# Altium PCB PCB1.PcbDoc
Units mil, origin at the board's own origin, x right, y up, seen from the top; angles counter-clockwise.
Board outline 1181.1 x 1456.69 mil, 4 copper layers (Top Layer, Layer 2, Layer 3, Bottom Layer), stack 23.756 mil thick; 82 components, 42 nets, 316 pads, 160 vias.
Unrouted connection lines stored in the file: 4.
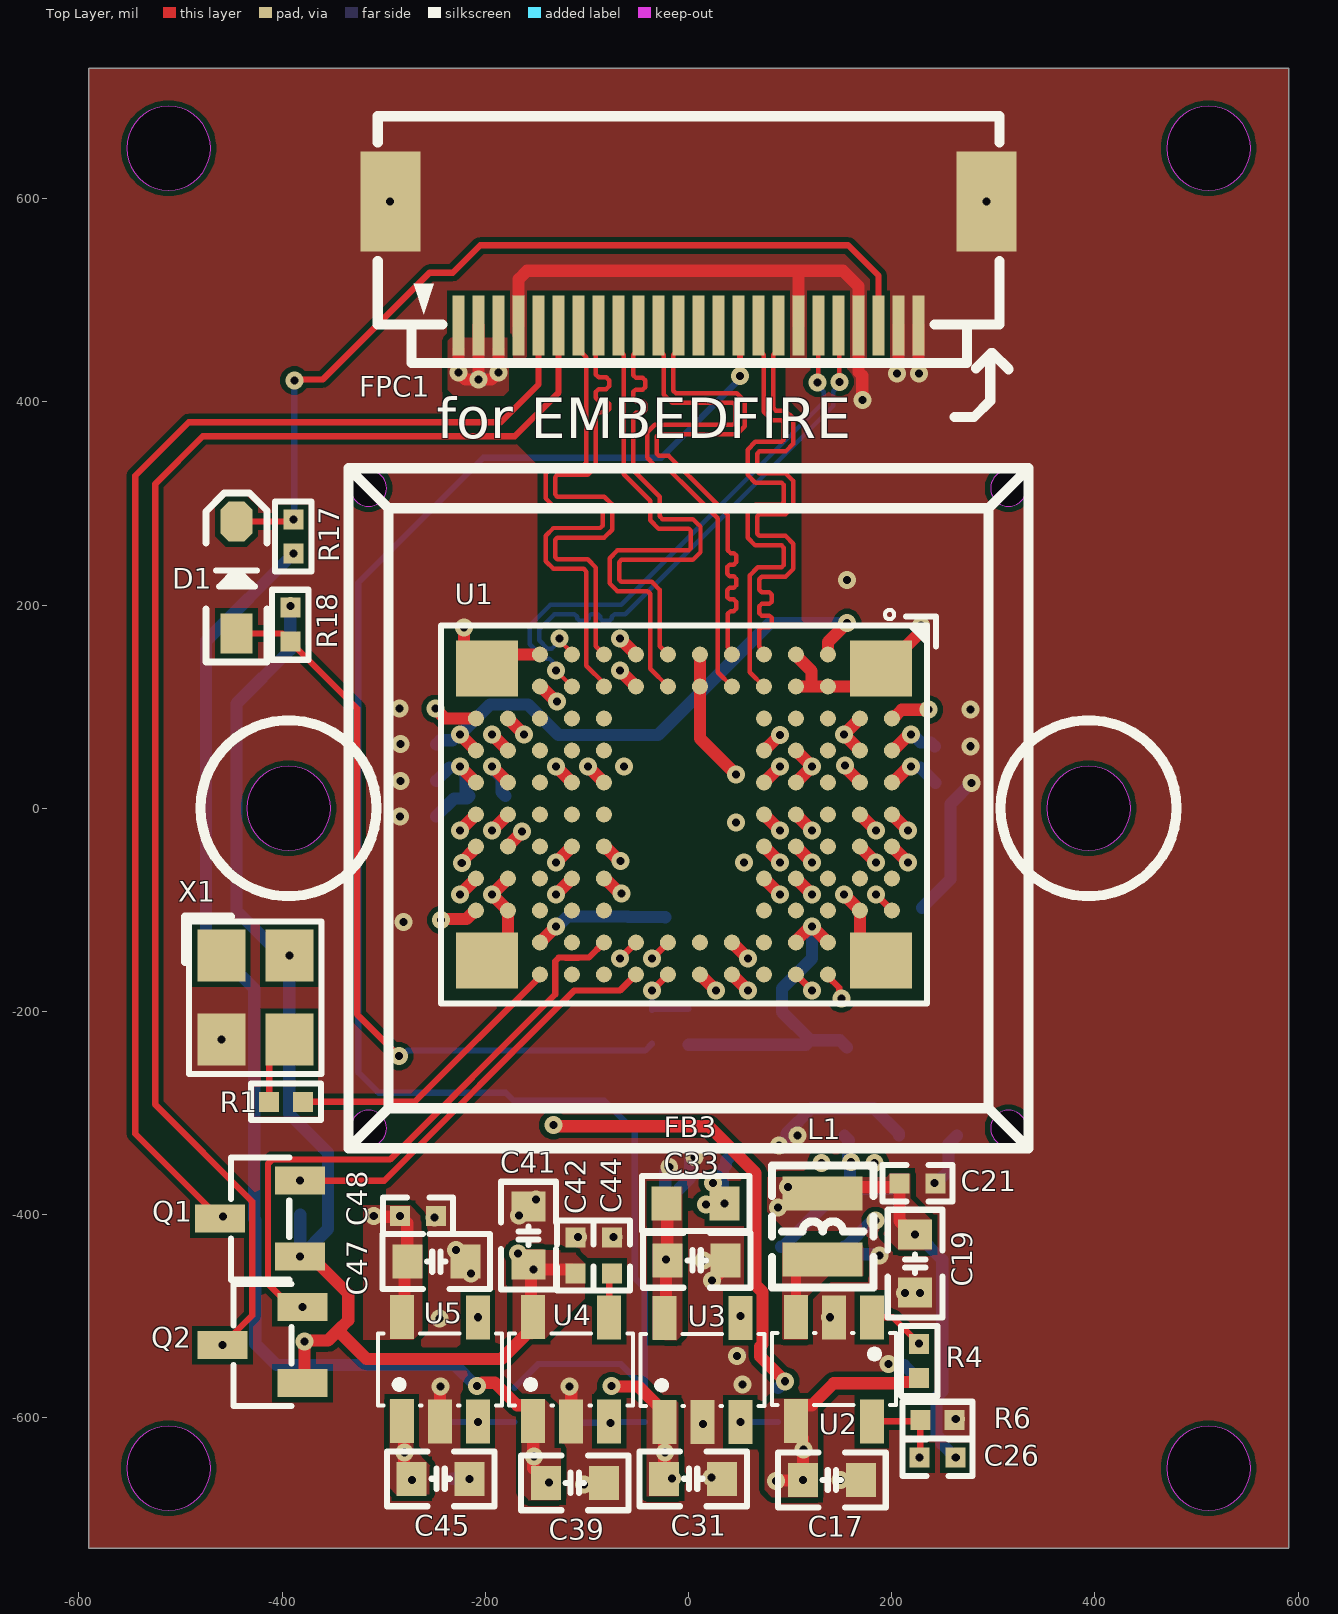
[diagram p0: Top Layer view]
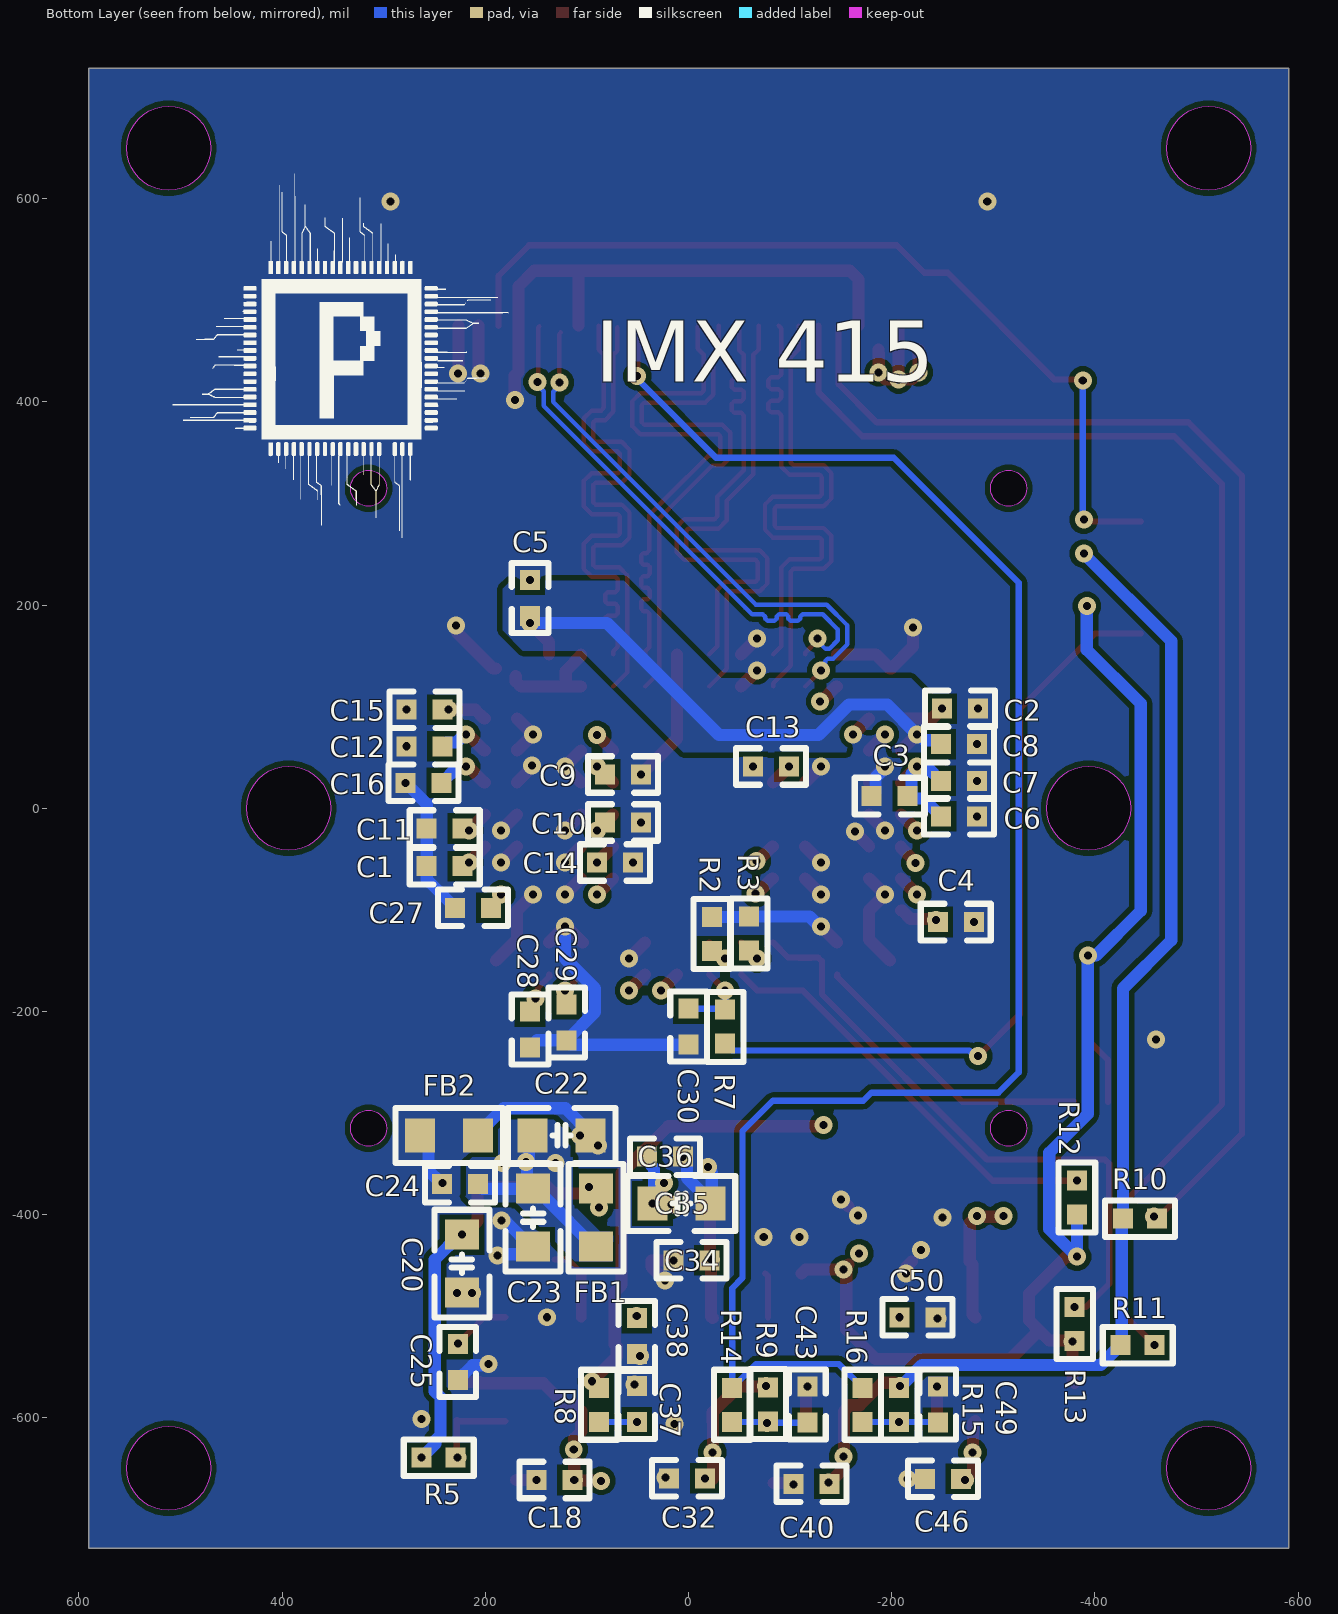
[diagram p1: Bottom Layer view, seen from below]
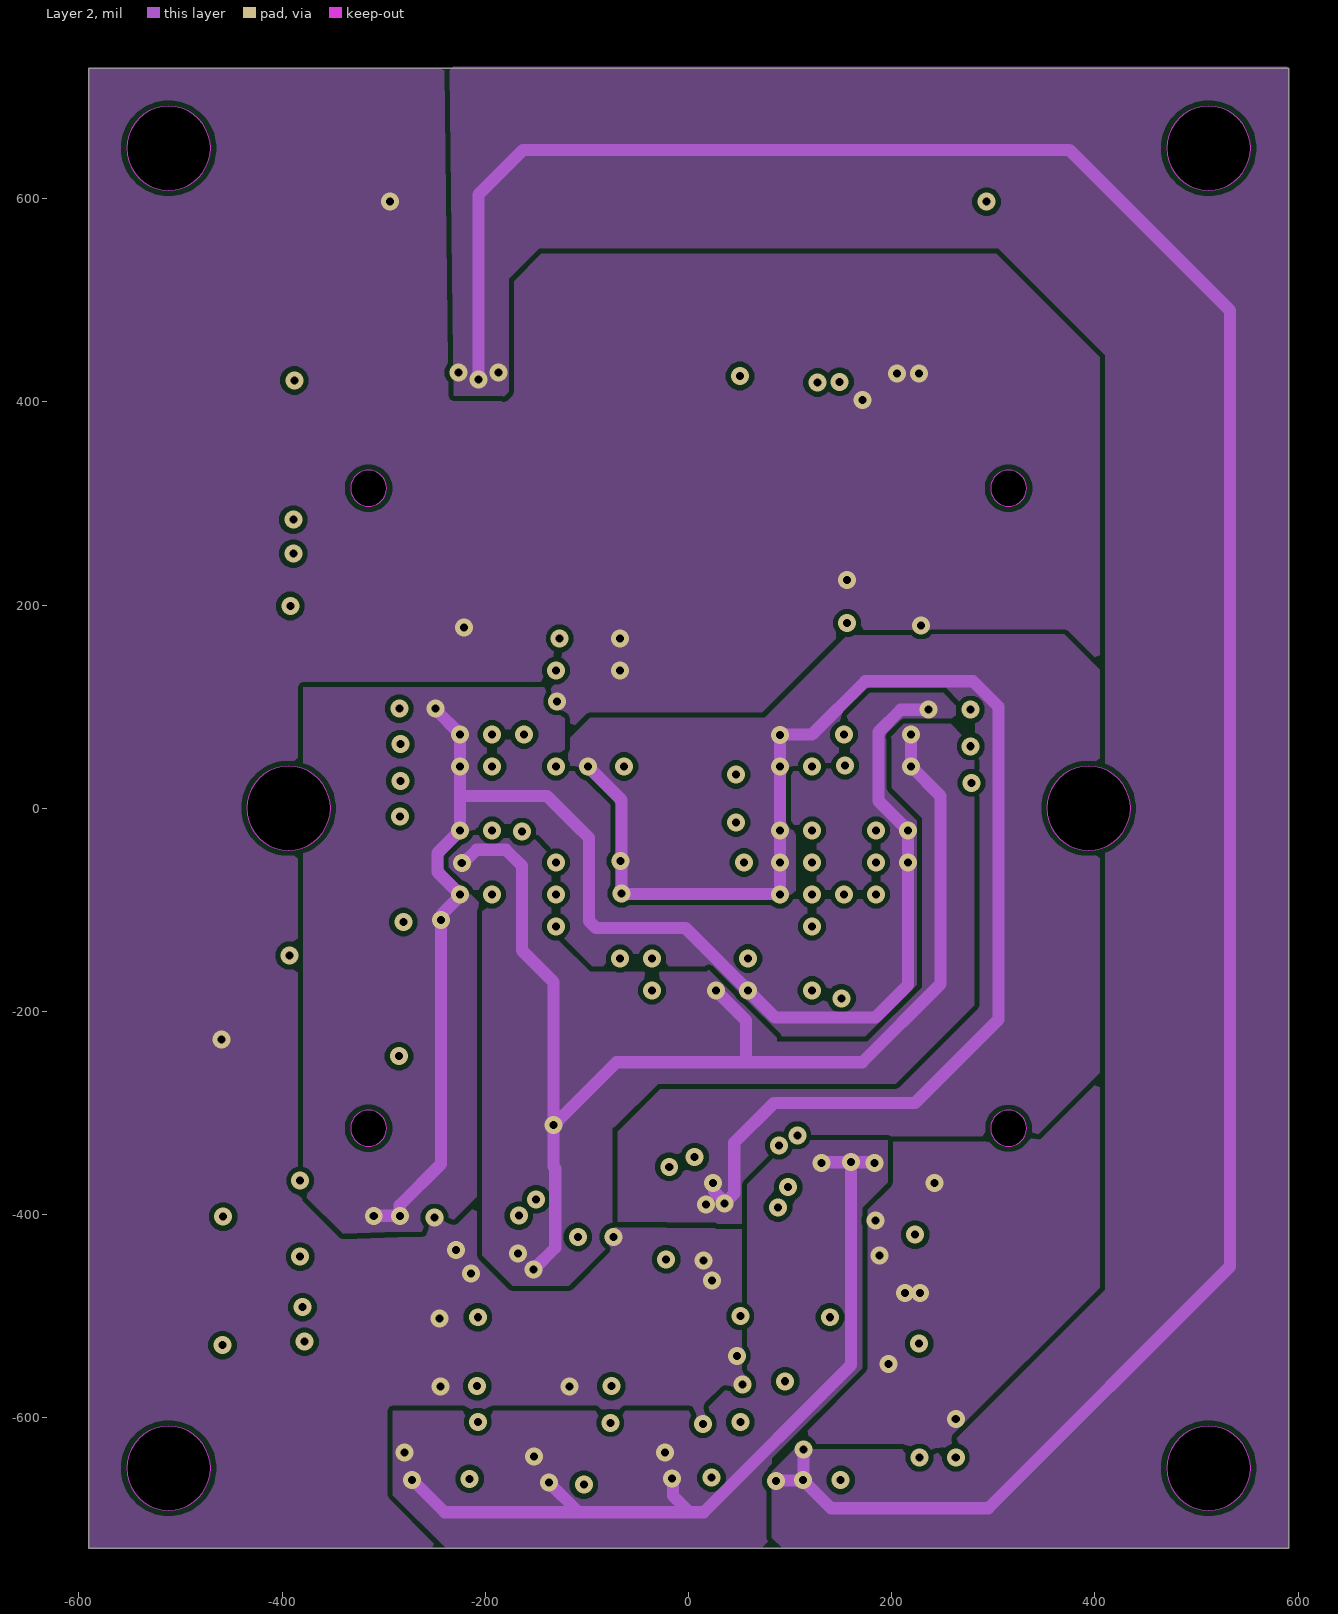
[diagram p2: Layer 2]
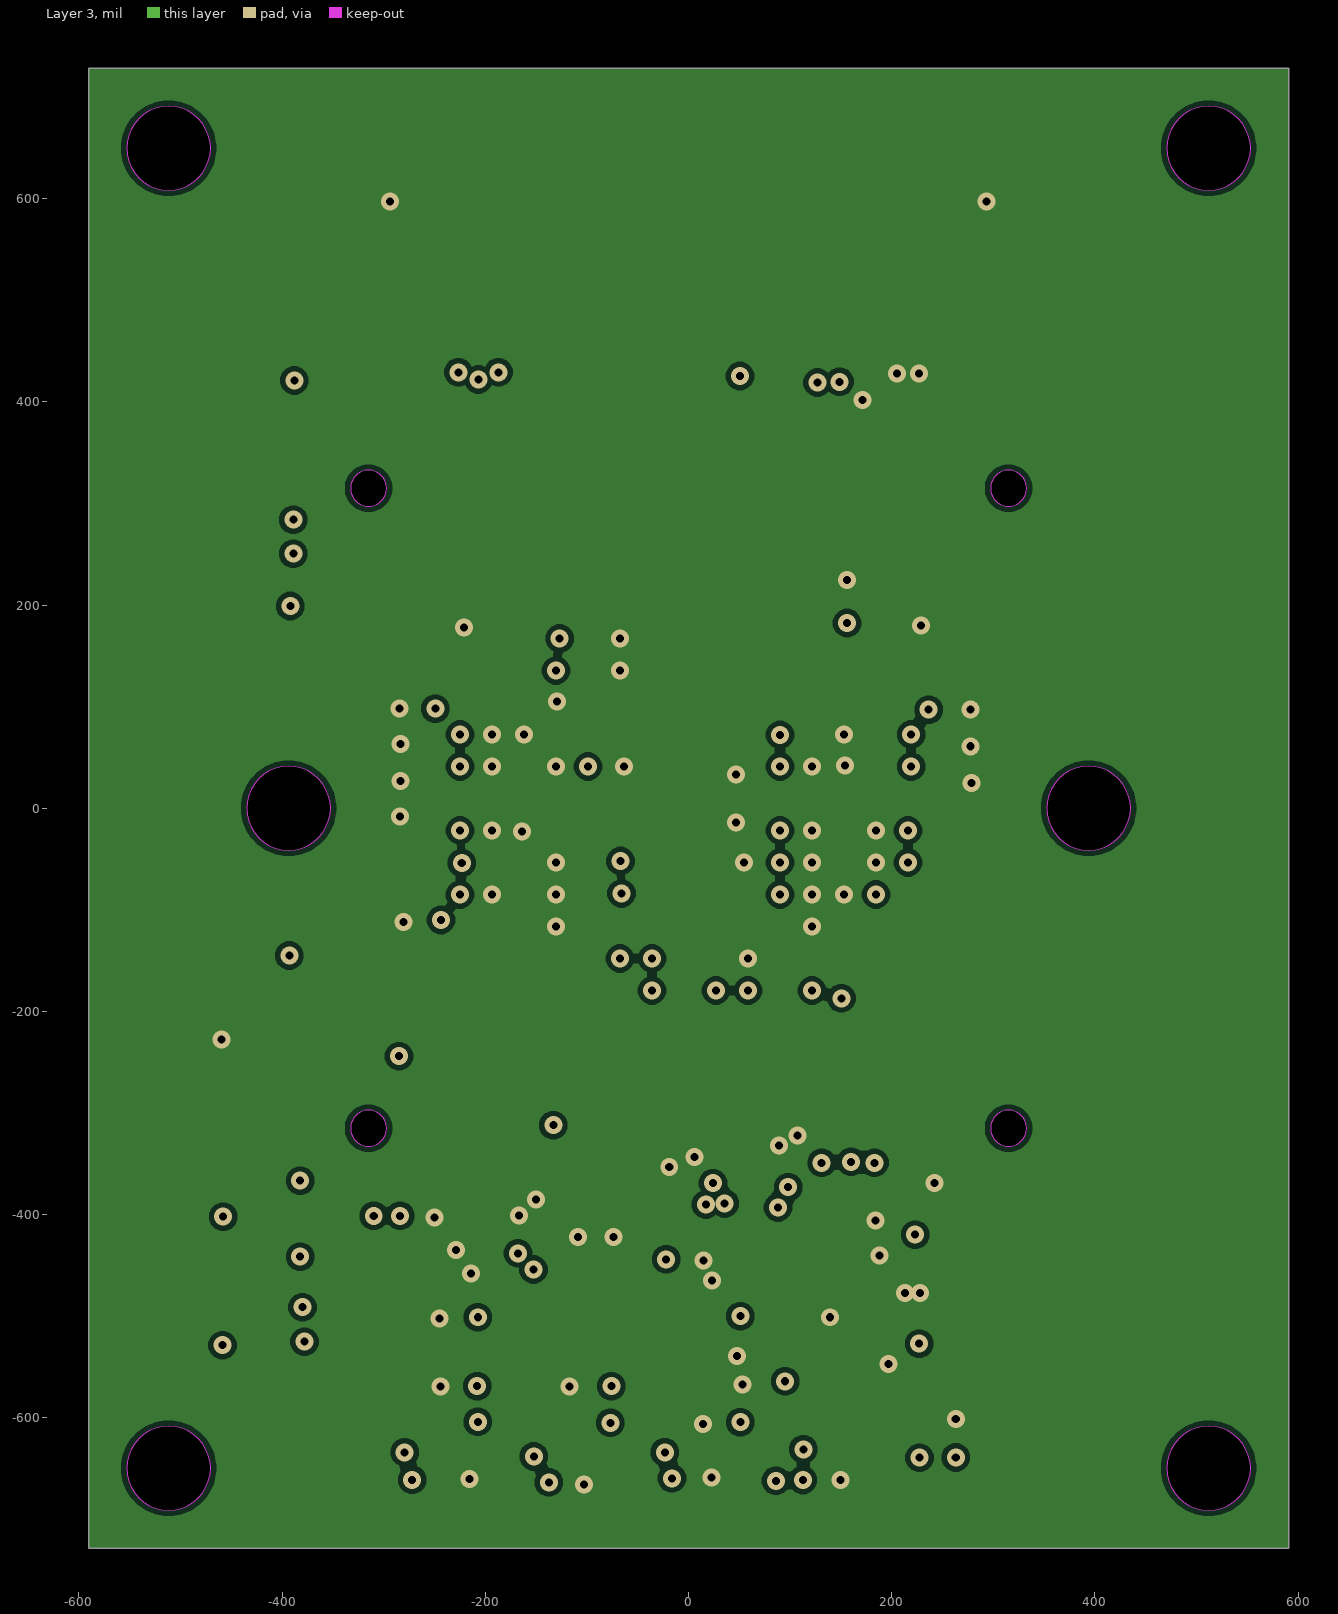
[diagram p3: Layer 3]
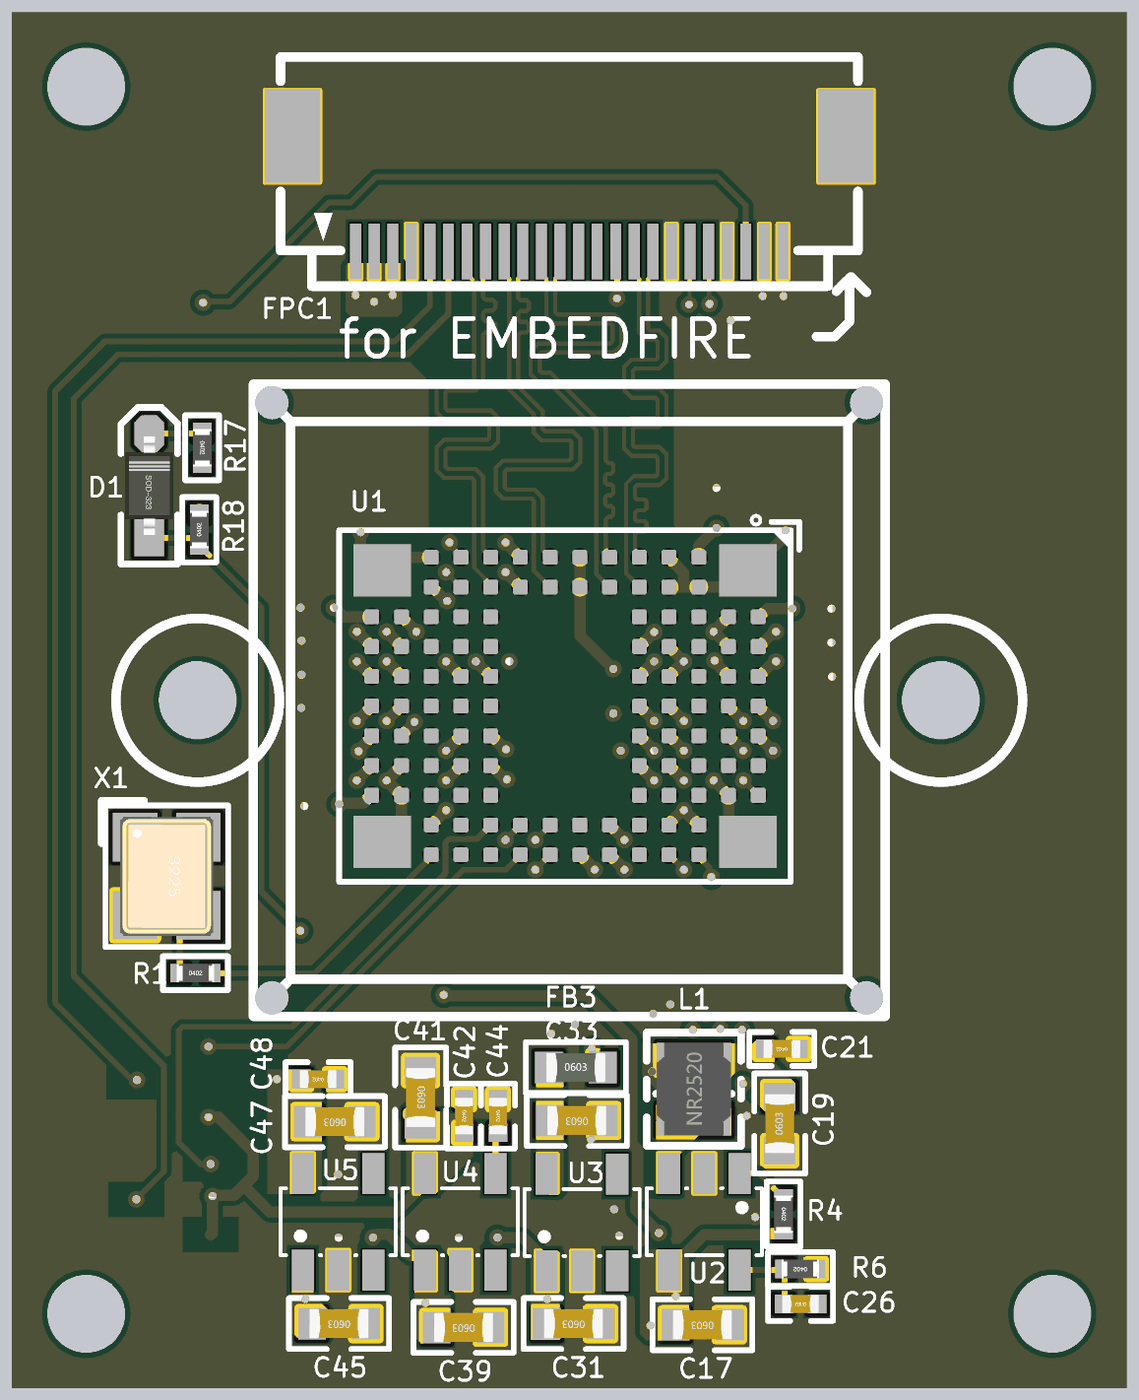
[diagram p4: 3D render of the assembled board from above, using the file's embedded part models]
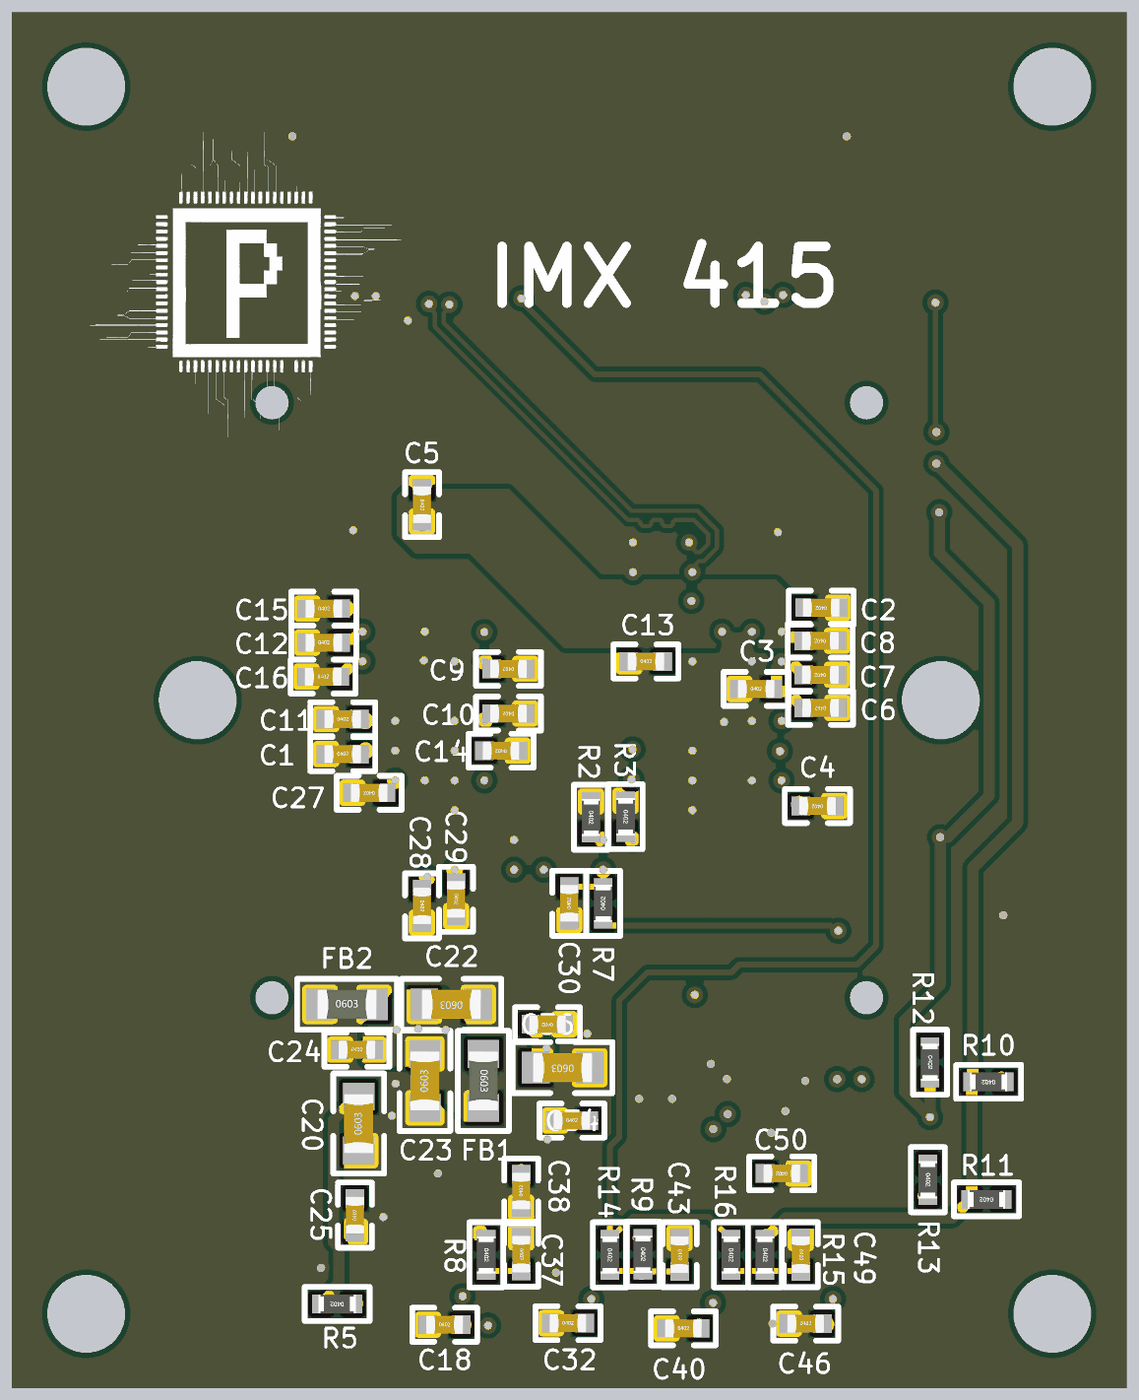
[diagram p5: 3D render of the assembled board from below, using the file's embedded part models]

## Layer stack, top to bottom
Top Solder: solder mask 0.4, Solder Resist, Dk 3.5
Top Layer: signal copper 1.4
Dielectric 4: prepreg 2.8, PP-006, Dk 4.1
Layer 2: signal copper 1.378
Dielectric 1: dielectric 12.6, FR-4, Dk 4.8
Layer 3: signal copper 1.378
Dielectric 5: prepreg 2.8, PP-006, Dk 4.1
Bottom Layer: signal copper 1.4
Bottom Solder: solder mask 0.4, Solder Resist, Dk 3.5

## Board outline
-590.55,-728.35 -590.55,728.35 590.55,728.35 590.55,-728.35
cut-out: 470.47,-649.61 ccw(c511.81,-649.61) 511.81,-690.94 ccw(c511.81,-649.61) 553.15,-649.61 ccw(c511.81,-649.61) 511.81,-608.27 ccw(c511.81,-649.61)
cut-out: -553.15,-649.61 ccw(c-511.81,-649.61) -511.81,-690.94 ccw(c-511.81,-649.61) -470.47,-649.61 ccw(c-511.81,-649.61) -511.81,-608.27 ccw(c-511.81,-649.61)
cut-out: -553.15,649.61 ccw(c-511.81,649.61) -511.81,608.27 ccw(c-511.81,649.61) -470.47,649.61 ccw(c-511.81,649.61) -511.81,690.94 ccw(c-511.81,649.61)
cut-out: 470.47,649.61 ccw(c511.81,649.61) 511.81,608.27 ccw(c511.81,649.61) 553.15,649.61 ccw(c511.81,649.61) 511.81,690.94 ccw(c511.81,649.61)
cut-out: 297.24,-314.96 ccw(c314.96,-314.96) 314.96,-332.68 ccw(c314.96,-314.96) 332.68,-314.96 ccw(c314.96,-314.96) 314.96,-297.24 ccw(c314.96,-314.96)
cut-out: -332.68,-314.96 ccw(c-314.96,-314.96) -314.96,-332.68 ccw(c-314.96,-314.96) -297.24,-314.96 ccw(c-314.96,-314.96) -314.96,-297.24 ccw(c-314.96,-314.96)
cut-out: 297.24,314.96 ccw(c314.96,314.96) 314.96,297.24 ccw(c314.96,314.96) 332.68,314.96 ccw(c314.96,314.96) 314.96,332.68 ccw(c314.96,314.96)
cut-out: -332.68,314.96 ccw(c-314.96,314.96) -314.96,297.24 ccw(c-314.96,314.96) -297.24,314.96 ccw(c-314.96,314.96) -314.96,332.68 ccw(c-314.96,314.96)
cut-out: 352.36,0 ccw(c393.7,0) 393.7,-41.34 ccw(c393.7,0) 435.04,0 ccw(c393.7,0) 393.7,41.34 ccw(c393.7,0)
cut-out: -435.04,0 ccw(c-393.7,0) -393.7,-41.34 ccw(c-393.7,0) -352.36,0 ccw(c-393.7,0) -393.7,41.34 ccw(c-393.7,0)

## Design rules (kind name [scope] priority, off if disabled: settings)
Clearance via_poly [IsVia vs InPoly] p1: gap=5 ignorepadtopadclearanceinfootprint=FALSE
Clearance poly [InPoly] p2: gap=5 ignorepadtopadclearanceinfootprint=FALSE
Clearance Clearance_all [All] p3: gap=4 ignorepadtopadclearanceinfootprint=FALSE
DiffPairsRouting 95ohm [InDifferentialPairClass('MIPI')] p1: maxlimit=8 minlimit=5 mostfreqgap=5 toplayer_minwidth=4.42 toplayer_maxwidth=4.42 toplayer_prefwidth=4.42 midlayer1_minwidth=4.42 midlayer1_maxwidth=4.42 midlayer1_prefwidth=4.42 midlayer2_minwidth=4.42 midlayer2_maxwidth=4.42 midlayer2_prefwidth=4.42 bottomlayer_minwidth=4.42 bottomlayer_maxwidth=4.42 bottomlayer_prefwidth=4.42 maxuncoupledlength=500
PlaneClearance [All] p1: clearance=7
PlaneConnect [All] p1: planeconnectstyle=Direct reliefexpansion=20 reliefentries=4 reliefconductorwidth=10 reliefairgap=10
PolygonConnect [All] p1: connectstyle=Direct reliefconductorwidth=10 reliefentries=4 polygonreliefangle="90 Angle" airgapwidth=10
RoutingVias [All] p1: holewidth=7.9 width=17.7 viastyle="Through Hole" minholewidth=7.9 minwidth=17.7 maxholewidth=7.9 maxwidth=17.7
SolderMaskExpansion [All] p1: expansion=4 istentingtop=FALSE
Width power [InNetClass('power')] p1: maxlimit=20 minlimit=10 preferedwidth=12 minimp=50.000000 maximp=50.000000 favimp=50.000000
Width [All] p2: maxlimit=14 minlimit=5 preferedwidth=6.16
27 further rules are at their usual default settings.

## Classes and differential pairs
differential pair class MIPI: 1.MIPI_CSI_CLK 2.MIPI_CSI_D0 3.MIPI_CSI_D1 4.MIPI_CSI_D2 5.MIPI_CSI_D3
net class MIPI: MIPI_CSI_CLKN MIPI_CSI_CLKP MIPI_CSI_D0N MIPI_CSI_D0P MIPI_CSI_D1N MIPI_CSI_D1P MIPI_CSI_D2N MIPI_CSI_D2P MIPI_CSI_D3N MIPI_CSI_D3P
net class power: 2V8 AVDD_2V8 AVDD_3V3 DOVDD_1V8 DVDD_1V2 GND VDD_3V3 VDD_5V
differential pair 5.MIPI_CSI_D3: +MIPI_CSI_D3P -MIPI_CSI_D3N
differential pair 4.MIPI_CSI_D2: +MIPI_CSI_D2P -MIPI_CSI_D2N
differential pair 3.MIPI_CSI_D1: +MIPI_CSI_D1P -MIPI_CSI_D1N
differential pair 2.MIPI_CSI_D0: +MIPI_CSI_D0P -MIPI_CSI_D0N
differential pair 1.MIPI_CSI_CLK: +MIPI_CSI_CLKP -MIPI_CSI_CLKN

## Components (designator, comment, footprint, x,y, rotation, side; value= is the part's Value field where it differs from the comment)
C1 "0.1uf" C0402_L 240,-57 r180 bottom
C2 "1uf" C0402_L -267,98 r0 bottom
C3 "1uf" C0402_L -198,12 r180 bottom
C4 "4.7uf" C0402_L -263,-112 r0 bottom
C5 "10nf" C0402_L 156,207 r270 bottom
C6 "1uf" C0402_L -266.28,-8 r0 bottom
C7 "0.1uf" C0402_L -266,27 r0 bottom
C8 "0.1uf" C0402_L -266,63 r0 bottom
C9 "1uf" C0402_L 64.4,33.2 r0 bottom
C10 "0.1uf" C0402_L 64.4,-14.04 r0 bottom
C11 "0.1uf" C0402_L 240,-20 r180 bottom
C12 "0.1uf" C0402_L 260,61 r180 bottom
C13 "10nf" C0402_L -81.28,41.07 r180 bottom
C14 "4.7uf" C0402_L 72.28,-53.41 r0 bottom
C15 "4.7uf" C0402_L 260,97 r180 bottom
C16 "4.7uf" C0402_L 260.72,25 r180 bottom
C17 "22uf" C0603_L 141.05,-661.18 r180 top
C18 "0.1uf" C0402_L 132.05,-661.18 r180 bottom
C19 "22uf" C0603_L 223.05,-448.18 r90 top
C20 "22uf" C0603_L 223.05,-448.18 r90 bottom
C21 "0.1uf" C0402_L 225.33,-369.18 r180 top
C22 "22uf" C0603_L 125,-322 r0 bottom
C23 "22uf" C0603_L 153,-403 r90 bottom
C24 "0.1uf" C0402_L 225,-370 r180 bottom
C25 "0.1uf" C0402_L 227.05,-545.17 r90 bottom
C26 "22pf" C0402_L 245.05,-639.18 r180 top
C27 "0.1uf" C0402_L 212,-98 r0 bottom
C28 "10uf" C0402_L 156,-217.72 r270 bottom
C29 "4.7uf" C0402_L 120,-210.72 r270 bottom
C30 "NC" C0402_L 0,-215 r90 bottom
C31 "22uf" C0603_L 4.54,-660 r180 top
C32 "0.1uf" C0402_L 1.35,-659.49 r180 bottom
C33 "22uf" C0603_L 8,-445 r180 top
C34 "0.1uf" C0402_L -2.83,-445 r180 bottom
C35 "22uf" C0603_L 7,-389 r0 bottom
C36 "0.1uf" C0402_L 23,-343 r0 bottom
C37 "0.1uf" C0402_L 50.91,-586.47 r270 bottom
C38 "NC" C0402_L 50.91,-519.54 r90 bottom
C39 "22uf" C0603_L -112,-664 r180 top
C40 "0.1uf" C0402_L -121,-665 r180 bottom
C41 "22uf" C0603_L -157.49,-420.64 r270 top
C42 "0.1uf" C0402_L -111.49,-440.18 r270 top
C43 "1uf" C0402_L -117,-587 r270 bottom
C44 "NC" C0402_L -75.49,-440.18 r270 top
C45 "22uf" C0603_L -244,-660 r180 top
C46 "0.1uf" C0402_L -250.5,-660 r180 bottom
C47 "22uf" C0603_L -248.31,-446.18 r180 top
C48 "0.1uf" C0402_L -266.14,-401.18 r180 top
C49 "0.1uf" C0402_L -245.36,-587 r270 bottom
C50 "NC" C0402_L -225.16,-501 r0 bottom
D1 "RB521S30" SOD-323 -445,227.12 r90 top
FB1 "100R@100MHz" FB0603 91,-403 r270 bottom
FB2 "100R@100MHz" FB0603 235.54,-322 r180 bottom
FB3 "100R@100MHz" FB0603 7,-389 r0 top
FPC1 "ZX-0.5FPC-2H-HFJ24P" FPC-SMD_24P-P0.50_ZX-0.5FPC-2H-HFJ24P 0,559.71 r180 top
L1 "2.2uH" NR2520 132.05,-411.7 r90 top
Q1 "2SK3018" SOT-23-3_L2.9-W1.3-P1.90-LS2.4-BR -17374.25,16193 r0 top
Q2 "2SK3018" SOT-23-3_L2.9-W1.3-P1.90-LS2.4-BR -17371.99,16068.6 r0 top
R1 "0R" R0402_L -396,-289 r0 top
R2 "10K" R0402_L -23,-124 r270 bottom
R3 "10K" R0402_L -59.62,-123.3 r270 bottom
R4 "10K" R0402_L 227.05,-544.18 r270 top
R5 "200K" R0402_L 246.03,-639.18 r0 bottom
R6 "44.2K" R0402_L 244.78,-602.18 r180 top
R7 "100R" R0402_L -36,-215 r90 bottom
R8 "1K" R0402_L 88,-587.27 r270 bottom
R9 "1K" R0402_L -78.09,-586.63 r270 bottom
R10 "4.7K" R0402_L -444.27,-404 r0 bottom
R11 "4.7K" R0402_L -442,-528.4 r0 bottom
R12 "4.7K" R0402_L -382.26,-383.33 r270 bottom
R13 "4.7K" R0402_L -380,-507.73 r270 bottom
R14 "NC" R0402_L -43,-587.27 r270 bottom
R15 "1K" R0402_L -207.36,-587.27 r270 bottom
R16 "NC" R0402_L -171.36,-587.27 r270 bottom
R17 "10K" R0402_L -389,267.27 r270 top
R18 "10K" R0402_L -392,180.73 r90 top
U1 "IMX415-AAQR-C" BGA-110_L12.0-W9.3-BL_IMX415-AAQR-C 0,0 r180 top locked
U2 "MT3520B" SOT-23-5_L3.0-W1.7-P0.95-LS2.8-BR 143.05,-552.18 r90 top
U3 "XC6221A282MR-G" SOT-23-5_L3.0-W1.7-P0.95-LS2.8-BR 13.5,-553 r270 top
U4 "XC6221A182MR-G" SOT-23-5_L3.0-W1.7-P0.95-LS2.8-BR -115.49,-552.18 r270 top
U5 "XC6221A182MR-G" SOT-23-5_L3.0-W1.7-P0.95-LS2.8-BR -244.85,-552.18 r270 top
X1 "80M" OSC-3225-4P -426.46,-186.34 r270 top

## Footprints (in the part's own frame and the unit in brackets; to place one, negate y for a bottom-side part, rotate by r counter-clockwise, add the part's x,y. Pads: shape width x height; smd on the part's side, far side on the other; paste and mask are expansions set on the pad)
BGA-110_L12.0-W9.3-BL_IMX415-AAQR-C [mm]
  rect 1.55x1.4 smd paste-100 mask-0.05: 1(-4.811,-3.493) 2(-4.811,3.807) 3(5.039,3.807) 4(5.039,-3.493)
  round 0.4 smd paste-100 mask+0.051: A3(-5.086,-2.243) A4(-5.086,-1.443) A5(-5.086,-0.643) A6(-5.086,0.157) A7(-5.086,0.957) A8(-5.086,1.757) A9(-5.086,2.557) B3(-4.286,-2.243) B4(-4.286,-1.443) B5(-4.286,-0.643) B6(-4.286,0.157) B7(-4.286,0.957) B8(-4.286,1.757) B9(-4.286,2.557) C1(-3.486,-3.843) C2(-3.486,-3.043) C3(-3.486,-2.243) C4(-3.486,-1.443) C5(-3.486,-0.643) C6(-3.486,0.157) C7(-3.486,0.957) C8(-3.486,1.757) C9(-3.486,2.557) C10(-3.486,3.357) C11(-3.486,4.157) D1(-2.686,-3.843) D2(-2.686,-3.043) D3(-2.686,-2.243) D4(-2.686,-1.443) D5(-2.686,-0.643) D6(-2.686,0.157) D7(-2.686,0.957) D8(-2.686,1.757) D9(-2.686,2.557) D10(-2.686,3.357) D11(-2.686,4.157) E1(-1.886,-3.843) E2(-1.886,-3.043) E3(-1.886,-2.243) E4(-1.886,-1.443) E5(-1.886,-0.643) E6(-1.886,0.157) E7(-1.886,0.957) E8(-1.886,1.757) E9(-1.886,2.557) E10(-1.886,3.357) E11(-1.886,4.157) F1(-1.086,-3.843) F2(-1.086,-3.043) F10(-1.086,3.357) F11(-1.086,4.157) G1(-0.286,-3.843) G2(-0.286,-3.043) G10(-0.286,3.357) G11(-0.286,4.157) H1(0.514,-3.843) H2(0.514,-3.043) H10(0.514,3.357) H11(0.514,4.157) J1(1.314,-3.843) J2(1.314,-3.043) J10(1.314,3.357) J11(1.314,4.157) K1(2.114,-3.843) K2(2.114,-3.043) K3(2.114,-2.243) K4(2.114,-1.443) K5(2.114,-0.643) K6(2.114,0.157) K7(2.114,0.957) K8(2.114,1.757) K9(2.114,2.557) K10(2.114,3.357) K11(2.114,4.157) L1(2.914,-3.843) L2(2.914,-3.043) L3(2.914,-2.243) L4(2.914,-1.443) L5(2.914,-0.643) L6(2.914,0.157) L7(2.914,0.957) L8(2.914,1.757) L9(2.914,2.557) L10(2.914,3.357) L11(2.914,4.157) M1(3.714,-3.843) M2(3.714,-3.043) M3(3.714,-2.243) M4(3.714,-1.443) M5(3.714,-0.643) M6(3.714,0.157) M7(3.714,0.957) M8(3.714,1.757) M9(3.714,2.557) M10(3.714,3.357) M11(3.714,4.157) N3(4.514,-2.243) N4(4.514,-1.443) N5(4.514,-0.643) N6(4.514,0.157) N7(4.514,0.957) N8(4.514,1.757) N9(4.514,2.557) P3(5.314,-2.243) P4(5.314,-1.443) P5(5.314,-0.643) P6(5.314,0.157) P7(5.314,0.957) P8(5.314,1.757) P9(5.314,2.557)
  silkscreen extent -6.19,-4.96 6.19,4.88
C0402_L [mm]
  rect 0.5x0.5 smd: 1(-0.45,0) 2(0.45,0)
  silkscreen extent -0.87,-0.46 0.88,0.46, body extent -0.5,-0.25 0.5,0.25, height 0.5
C0603_L [mm]
  rect 0.75x0.85 smd: 1(-0.725,0) 2(0.725,0)
  silkscreen extent -1.35,-0.69 1.35,0.69, body extent -0.8,-0.4 0.8,0.4, height 0.8
FB0603 [mm]
  rect 0.75x0.85 smd: 1(-0.725,0) 2(0.725,0)
  silkscreen extent -1.35,-0.69 1.35,0.69, body extent -0.8,-0.4 0.8,0.4, height 0.8
FPC-SMD_24P-P0.50_ZX-0.5FPC-2H-HFJ24P [mm]
  rect 0.3x1.5 smd paste+0 mask+0.051: 1(5.75,2.152) 2(5.25,2.152) 3(4.75,2.152) 4(4.25,2.152) 5(3.75,2.152) 6(3.25,2.152) 7(2.75,2.152) 8(2.25,2.152) 9(1.75,2.152) 10(1.25,2.152) 11(0.75,2.152) 12(0.25,2.152) 13(-0.25,2.152) 14(-0.75,2.152) 15(-1.25,2.152) 16(-1.75,2.152) 17(-2.25,2.152) 18(-2.75,2.152) 19(-3.25,2.152) 20(-3.75,2.152) 21(-4.25,2.152) 22(-4.75,2.152) 23(-5.25,2.152) 24(-5.75,2.152)
  rect 1.5x2.5 smd paste+0 mask+0.051: 25(-7.45,-0.948) 26(7.45,-0.948)
  silkscreen extent -7.77,-3.08 7.77,3.08
NR2520 [mm]
  rect 0.85x2 smd: 1(-0.825,0) 2(0.825,0)
  silkscreen extent -1.52,-1.27 1.52,1.27, body extent -1.25,-1 1.25,1, height 1.12
OSC-3225-4P [mm]
  rect 1.3x1.2 smd: 1(-1.05,-0.85) 2(1.05,-0.85) 3(1.05,0.85) 4(-1.05,0.85)
  silkscreen extent -2.03,-1.75 1.91,1.65, body extent -1.6,-1.25 1.6,1.25, height 0.7
R0402_L [mm]
  rect 0.5x0.5 smd: 1(-0.425,0) 2(0.425,0)
  silkscreen extent -0.88,-0.46 0.87,0.46, body extent -0.5,-0.25 0.5,0.25, height 0.3
SOD-323 [mm]
  rect 1x0.8 smd: 1(-1.4,0)
  oct 1x0.8 smd: 2(1.4,0)
  silkscreen extent -2.11,-0.76 2.11,0.76, body extent -1.32,-0.65 1.32,0.65, height 0.95
SOT-23-3_L2.9-W1.3-P1.90-LS2.4-BR [mm]
  rect 1.25x0.7 smd paste+0 mask+0.051: 1(431.596,-422.514) 2(431.596,-420.614) 3(429.597,-421.564)
  silkscreen extent 429.87,-423.09 431.32,-420.04
SOT-23-5_L3.0-W1.7-P0.95-LS2.8-BR [mm]
  rect 1.1x0.6 smd paste+0 mask+0.051: 1(1.3,-0.95) 2(1.3,0) 3(1.3,0.95) 4(-1.3,0.95) 5(-1.3,-0.95)
  silkscreen extent -0.9,-1.55 0.9,1.55

## Part data
C1 C2 C3 C4 C5 C6 C7 C8 C9 C10 C11 C12 C13 C14 C15 C16 C17 C18 C19 C20 C21 C22 C23 C24 C25 C26 C27 C28 C29 C30 C31 C32 C33 C34 C35 C36 C37 C38 C39 C40 C41 C42 C43 C44 C45 C46 C47 C48 C49 C50: library part C, "贴片电容/MLCC电容"
D1: library part TVS
FB1 FB2 FB3: library part FB, "贴片磁珠"
L1: library part L-NR, "太诱-NR磁胶电感"
R1 R2 R3 R4 R5 R6 R7 R8 R9 R10 R11 R12 R13 R14 R15 R16 R17 R18: library part R, "贴片电阻"
U4 U5: library part XC6221A282MR-G
X1: library part XTAL-ACT-4P, "4脚有源晶振(振荡器)"

## Via types
v1: diameter 17.7, hole 7.9, Top Layer to Bottom Layer, tented both sides, 160 vias

## Nets (pads, with @x,y where several pads share a name; then routed paths per layer and width w, separated by ;. In a path a pad name is that pad's centre, name@x,y a point inside that pad or via, vN(x,y) a via of type N, cw(c..) or ccw(c..) an arc to the next point about the centre after c; other vN are vias at no path point)
2V8: C33.2 C34.2 FB3.1 U3.5 | length 116.1
  Top Layer w12: U3.5 -22.22,-500.14 -22.22,-444.22 v1(-22,-444) -21.04,-443.04 -21.04,-389.5 FB3.1
  Bottom Layer w12: v1(-22,-444) -21,-445 C34.2
AVDD_2V8: C9.2 C10.2 C13.2 C14.2 C35.2 C36.2 FB3.2 U1.E4 U1.E5 U1.E6 U1.E7 U1.E8 U1.K5 U1.K7 U1.K8 | length 1631.4
  Top Layer w12: v1(-98.99,41.07) U1.K5 ; U1.K8 -82.23,-69.16 -67.52,-83.87 v1(-66,-83.87) ; U1.K7 -82.29,-37.67 -67.96,-52 v1(-67,-52) ; U1.E8 v1(89.99,-84.91) ; U1.E7 v1(89.99,-53.41) ; U1.E6 v1(89.99,-21.92) ; U1.E5 v1(89.99,41.07) ; U1.E4 74.45,56.82 89.78,72.15 v1(89.99,72.15)
  Layer 2 w12: v1(-98.99,41.07) -66,8.08 v1(-66,-83.87) -65.48,-84.39 89.47,-84.39 v1(89.99,-84.91) v1(89.99,-53.41) v1(89.99,-21.92) v1(89.99,41.07) 89.99,72.57 121.48,72.57 173.91,125 280,125 305,100 305,-208 223,-290 84,-290 45,-329 45,-379.12 v1@35.54,-388.58 ; v1@25.09,-369.91 25.09,-377 35.54,-387.46 v1@35.54,-388.58 ; v1(35.54,-389) v1@35.54,-388.58
  Bottom Layer w12: C35.2@34,-388 34,-354.27 36.87,-351.39 36.87,-346.84 C36.2
  other v1: 17,-390 24,-369
AVDD_3V3: C19.2 C20.2 C21.2 C26.1 FB1.1 L1.2 R5.2 | length 416.6
  Top Layer w12: v1(98,-373) 104.22,-379.22 L1.2 138.25,-373.02 203.77,-373.02 C21.2 207.62,-406.17 221.08,-419.64 v1(223.05,-419.64) ; C26.1 C26.1 v1(263,-639)
  Bottom Layer w12: v1(223.05,-419.64) 225.02,-419.64 249.78,-444.4 249.78,-573.98 244,-579.76 244,-617 249.14,-622.14 249.14,-625.56 R5.2
  other v1: 88,-393
DOVDD_1V8: C12.2 C16.2 C41.2 C42.2 Q1.1 Q2.1 R8.1 R12.2 R13.2 R18.2 U1.A4 U1.A5 U1.G11 U1.P7 U4.5 X1.4 | length 3138.6
  Top Layer w12: R18.2 v1(-392,199) ; v1(-382.26,-441.4) -371.44,-441.4 -334.97,-477.87 -334.97,-503.97 -344.94,-513.94 ; Q2.1 -378,-563.8 v1(-378,-525) -376.91,-523.91 -354.91,-523.91 -344.94,-513.94 ; v1(-223.22,-53.88) -223.22,-52.68 -209.22,-38.68 U1.P7 ; C41.2 C41.2@-155.19,-451.48 ; v1(-133,-312) -132,-313 20,-313 66,-359 66,-469.3 72.72,-476.03 72.72,-527.62 70.64,-529.7 70.64,-539.64 v1(95,-564) ; C42.2 -115.34,-454.05 v1(-152.62,-454.05) C41.2@-155.19,-451.48 ; U1.G11 v1(27,-179.4) ; U1.A5 201.24,25.33 215.9,39.98 217.98,39.98 v1(219.07,41.07) ; U1.A4 201.24,56.82 215.9,71.48 217.98,71.48 v1(219.07,72.57) ; -344.94,-513.94 -316.88,-542 -184.05,-542 -155.19,-513.14 C41.2@-155.19,-451.48
  Layer 2 w12: v1(-223.22,-53.88) -221.68,-53.88 -208.57,-40.77 -179.82,-40.77 -164,-56.58 -164,-140 -133,-171 v1(-133,-312) ; v1(-152.62,-454.05) -131.15,-432.58 -131.15,-354.6 -133,-352.75 v1(-133,-312) ; v1(27,-179.4) 56.63,-209.03 56.63,-246.63 60,-250 ; v1@217.78,42.37 219.07,43.67 v1(219.07,72.57) ; v1(219.07,41.07) 248,12.15 248,-173 171,-250 60,-250 ; v1(-133,-312) -71,-250 60,-250
  Bottom Layer w12: v1(-392,199) -392,156 -445.04,102.96 -445.04,-100.96 -401,-145 v1(-393,-145) -393,-301 -355,-339 -355,-414.14 v1(-382.26,-441.4) R12.2 ; R13.2 -378.54,-524.46 v1(-378,-525) ; R8.1 94.54,-564 v1(95,-564) ; v1(219.07,41.07) 220.16,39.98 228.02,39.98 C16.2 ; v1(219.07,72.57) 220.62,72.57 228.34,64.84 238.44,64.84 C12.2
  other v1: -167.85,-438.18
DVDD_1V2: C1.2 C2.2 C3.2 C4.2 C5.2 C6.2 C7.2 C8.2 C11.2 C15.2 C47.2 C48.2 U1.A3 U1.A6 U1.A7 U1.C1 U1.F11 U1.P3 U1.P4 U1.P5 U1.P6 U1.P8 U1.P9 U5.5 | length 2496
  Top Layer w12: v1(-309.85,-401.18) -309.03,-402 C48.2@-288,-402 ; v1(-283.85,-401.18) -276.85,-408.18 C47.2 -279.55,-448.88 -279.55,-498.3 U5.5 ; v1(-249.28,98) -239.6,88.32 U1.P3 ; v1(-243.72,-110) -242.63,-108.91 -218.49,-108.91 -210.24,-100.66 U1.P9 ; v1(-224.97,-84.91) U1.P8 ; v1(-224.97,-21.92) U1.P6 ; v1(-224.97,41.07) U1.P5 ; v1(-224.97,72.57) U1.P4 ; U1.F11 v1(58.49,-179.4) ; U1.C1 137.23,163.5 v1(156,182.27) ; U1.A7 v1(215.97,-53.41) ; U1.A6 v1(215.97,-21.92) ; U1.A3 201.24,88.32 209.92,97 v1(236.27,97)
  Layer 2 w12: v1(-309.85,-401.18) -285.18,-401.18 v1@-285,-401 ; v1(-283.85,-401.18) -284.3,-400.74 -284.3,-390.8 -243.72,-350.22 v1(-243.72,-110) -242.63,-108.91 -242.63,-104.11 -224.97,-86.45 v1(-224.97,-84.91) -247,-62.88 -247,-43.95 v1(-224.97,-21.92) -224.97,9.61 ; v1(-249.28,98) -249.28,97.44 -224.97,73.13 v1(-224.97,72.57) v1(-224.97,41.07) -224.97,9.61 ; v1(236.27,97) 208.91,97 187,75.09 187,7.05 v1(215.97,-21.92) v1(215.97,-53.41) 215.97,-174.03 184,-206 85.09,-206 v1(58.49,-179.4) -2.91,-118 -91.06,-118 -98.09,-110.97 -98.09,-29.03 -105.12,-22 -105.29,-22 -139.29,12 -164,12 -222.58,12 -224.97,9.61
  Bottom Layer w12: C6.2 -230.95,9.61 -218.1,9.61 C3.2 -219.56,15.84 v1@-219.56,34.12 ; C7.2 -235.3,39.98 ; C8.2 -244.44,66.84 -232.24,66.84 -226.51,72.57 v1(-224.97,72.57) -195.54,102 -158,102 -128,72 -30,72 80.27,182.27 155.27,182.27 C5.2@156,183
GND: C1.1 C2.1 C3.1 C4.1 C5.1 C6.1 C7.1 C8.1 C9.1 C10.1 C11.1 C12.1 C13.1 C14.1 C15.1 C16.1 C17.1 C18.1 C19.1 C20.1 C21.1 C22.1 C23.1 C24.1 C25.1 C27.2 C28.2 C29.2 C30.1 C31.1 C32.1 C33.1 C34.1 C35.1 C36.1 C37.1 C38.1 C39.1 C40.1 C41.1 C42.1 C43.1 C44.1 C45.1 C46.1 C47.1 C48.1 C49.1 C50.1 FB2.1 FB2.2 FPC1.4 FPC1.18 FPC1.21 FPC1.23 FPC1.24 FPC1.25 FPC1.26 R2.1 R3.1 R6.1 U1.1 U1.2 U1.3 U1.4 U1.B3 U1.B4 U1.B5 U1.B6 U1.B7 U1.B9 U1.C2 U1.C10 U1.D1 U1.D2 U1.D4 U1.D5 U1.D6 U1.D7 U1.D8 U1.D10 U1.F10 U1.G1 U1.G2 U1.J1 U1.J2 U1.L5 U1.L7 U1.L8 U1.M1 U1.M2 U1.M10 U1.N3 U1.N4 U1.N5 U1.N6 U1.N7 U1.N8 U1.N9 U2.2 U3.2 U4.2 U5.2 X1.2 | length 3040.7
  Top Layer w12: v1(-294,597) v1(-294,597) FPC1.26 ; v1(-250,-403) -248.42,-401.42 C48.1 ; U5.2 -244.6,-603.12 -244.6,-569.25 v1(-244.36,-569) ; v1(-221,178) -221,159.09 -199.44,137.53 U1.4 -184.62,151.31 U1.M1 ; C47.1 -214,-451.95 v1(-214,-458) ; U1.3 -177.73,-129.2 U1.N9 v1(-193.48,-84.91) U1.N8 ; v1(-193.48,-21.92) U1.N6 ; v1(-193.48,41.07) U1.N5 ; v1(-193.48,72.57) U1.N4 ; U1.N7 -177.73,-37.2 -164,-23.47 v1(-164,-23) ; U1.N3 v1(-161.98,72.57) ; FPC1.4 -167.23,475.09 -167.23,520.74 -158.97,529 105,529 ; C41.1 -150.4,-385 v1(-150,-385) ; U1.M10 v1(-130.48,-116.41) ; U1.M2 -145.22,119.81 -130.56,105.16 v1(-129.39,105.16) ; v1(-130.48,-84.91) U1.L8 ; v1(-130.48,-53.41) U1.L7 ; v1(-130.48,41.07) U1.L5 ; v1(-117,-569.28) -115.49,-570.79 U4.2 ; C42.1 -109.46,-422.46 v1(-109,-422) ; v1(-103.07,-665.83) -101.24,-664 C39.1 ; C44.1 -74.46,-422.46 v1(-74,-422) ; v1(-67.49,135.56) U1.J2 ; v1(-67.49,167.06) U1.J1 ; U1.G1 11.25,68.64 v1(46.69,33.2) ; U3.2 13.51,-605.51 v1(14,-606) ; v1(14.89,-445) C33.1 36.54,-451.42 v1(23,-465) ; U1.F10 v1(58.49,-147.9) ; U1.D10@104,-132 104.35,-132 119.94,-116.41 v1(121.48,-116.41) U1.C10 ; U1.D8 v1(121.48,-84.91) ; U1.D7 v1(121.48,-53.41) ; U1.D6 v1(121.48,-21.92) ; U1.D5 v1(121.48,41.07) U1.D4 ; U1.D2 105.83,119.91 121.91,119.91 122,120 ; U1.D1 105.74,150.3 120.91,135.12 120.91,121.09 122,120 ; FPC1.18 108.27,525.73 105,529 ; v1(139.15,-501) U2.2 ; v1(149.77,-661.18) C17.1 ; v1(152.98,-84.91) U1.B9 168.73,-129.2 U1.2 ; v1(154,42) 155.09,40.91 155.09,39.29 168.73,25.65 U1.B5 ; U1.B7 v1(184.48,-53.41) ; U1.B6 v1(184.48,-21.92) ; U1.B4@168.73,57.84 U1.B4 v1(152.98,72.57) U1.B3 ; U1.1@170,130 170,124.93 164.89,119.81 U1.C2 137.14,119.91 122.09,119.91 122,120 ; v1(171,402) 171,425.66 167.42,429.24 167.42,474.91 FPC1.21 167.23,475.09 167.23,513.77 152,529 105,529 ; U1.1 192.35,137.53 227.91,173.09 227.91,178.91 v1(229,180) ; v1(205,428) 206.69,429.69 FPC1.23 ; FPC1.24 226.47,474.91 226.47,428.53 v1(227,428) ; R6.1 262.69,-601 v1(263,-601)
  Bottom Layer w12: C49.1 -244.64,-569.28 v1(-244.36,-569) ; v1(-245,-502) -244,-501 C50.1 ; C46.1 v1(-215.46,-660) ; v1(-193.48,41.07) -193.48,39.53 -184.13,30.18 -184.13,15.84 C3.1 ; v1(-130.48,-116.41) -128.94,-116.41 -119.1,-106.56 R3.1 -59.27,-106.92 -23.35,-106.92 R2.1 ; v1(-19,-353) -19,-354.54 -22.91,-358.45 -22.91,-387.63 C35.1 -21.54,-387.03 1.44,-364.05 1.44,-346.84 4.89,-343.39 v1(6.08,-343.39) 5.68,-343 C36.1 C36.1@3,-343 ; C30.1 115.72,-232.72 C29.2 ; C32.1 19.79,-658.78 v1(22.57,-658.78) ; v1(47.57,-538.95) 49.22,-538.95 C38.1 ; C37.1 52.66,-567 v1(53,-567) ; v1(89,-332) 96.46,-324.54 96.46,-320.03 121.22,-295.27 182.24,-295.27 207,-320.03 FB2.2 ; v1@121,-116 121.48,-116.48 121.48,-147.9 92,-177.39 92,-200.43 C29.2 ; C28.2 149,-228.43 C29.2 ; v1(184,-406) 182.91,-407.09 179.42,-407.09 154.97,-431.54 C23.1 160.37,-438.91 186.91,-438.91 v1(188,-440) ; v1(197,-547.15) 198.09,-548.24 212.41,-548.24 C25.1 ; C27.2 257.72,-70 C1.1 C11.1 257.72,4.28 v1(278.43,25) ; v1(242,-369) 242,-369.28 C24.1 ; C24.1@244,-367 245.72,-367 255.98,-356.73 255.98,-330.1 FB2.1
  other v1: 213,-477 228,-477 -229,-435 -167,-401 107,-322 -459.93,-227.68 -280.72,-112 54.56,-53.41 46.69,-14.04 -284,-8 -283.72,27 -63.56,41.07 277.72,61 -283.72,63 277.72,97 -284.72,98 156,224.72 293.31,597.05
I2C_SCL: FPC1.6 Q2.3 R11.1 | length 1399.5
  Top Layer w6.16: v1(-458.74,-528.4) -429.31,-498.98 -429.31,-387.29 -525,-291.6 -525,319.16 -478.08,366.08 -171.08,366.08 -127.95,409.21 FPC1.6
I2C_SDA: FPC1.5 Q1.3 R10.1 | length 1261.8
  Top Layer w6.16: v1(-458,-402) -460,-404 Q1.3 -544.68,-320.32 -544.68,327.32 -492,380 -185,380 -147.64,417.36 FPC1.5
IMX415_I2C_SCL: Q2.2 R13.1 U1.K10 | length 601.6
  Top Layer w6.16: v1(-380,-491) -390.83,-491 -413.95,-467.88 -413.95,-349.89 -409.8,-345.74 -293.74,-345.74 -131.28,-183.28 -131.28,-150.61 -127.67,-147 -121.04,-147 -120.93,-147.11 -108.54,-147.11 -108.43,-147 -98.09,-147 U1.K10
IMX415_I2C_SDA: Q1.2 R12.1 U1.J11 | length 414.6
  Top Layer w6.16: v1(-382.26,-366.6) -299.6,-366.6 -112.4,-179.4 -67.49,-179.4 U1.J11
IMX415_RESET: D1.1 R7.1 R18.1 | length 762.7
  Top Layer w6.16: D1.1 -400,172 R18.1 -326,98 -326,-203 v1(-285,-244)
  Bottom Layer w6.16: v1(-285,-244) -281.88,-244 -276.37,-238.49 -42.76,-238.49 R7.1
MIPI_CSI_CLKN: FPC1.10 U1.H1 | length 515.6
  Top Layer w4.42: FPC1.10@-50,473.39 -50,450.59 -54.32,446.28 -54.32,436 -54.32,426.07 -51.73,423.48 -45,423.48 -42.71,421.2 -42.71,414.34 -45,412.06 -52.03,412.06 -54.32,409.78 -54.32,402.92 -52.03,400.64 -45,400.64 -42.71,398.36 -42.71,391.5 -45,389.22 -51.73,389.22 -54.32,386.63 -54.32,373 -54.32,332.64 -33.68,312 -28.24,306.56 -28.24,287.25 -25.65,284.66 4.1,284.66 11.76,277 11.76,252.06 4.1,244.4 -66.1,244.4 -68.24,242.26 -68.24,225.12 -66.1,222.98 -36.35,222.98 -28.24,214.87 -28.24,206 -28.24,159.56 -20.25,151.57 U1.H1
MIPI_CSI_CLKP: FPC1.9 U1.H2 | length 517.6
  Top Layer w4.42: FPC1.9 -68.9,451.38 -63.74,446.22 -63.74,328.74 -47,312 -37.66,302.66 -37.66,283.35 -29.55,275.24 0.2,275.24 2.34,273.1 2.34,255.96 0.2,253.82 -70,253.82 -77.66,246.16 -77.66,221.22 -70,213.56 -40.25,213.56 -37.66,210.97 -37.66,206 -37.66,137.23 U1.H2
MIPI_CSI_D0N: FPC1.12 U1.F1 | length 541.7
  Top Layer w4.42: FPC1.12@-9,474.57 -9,452.22 -14.95,446.28 -14.95,416 -14.95,411.03 -12.36,408.44 47.59,408.44 55.25,400.78 55.25,375.84 47.59,368.18 -29.25,368.18 -31.39,366.04 -31.39,348.9 -29.25,346.76 -19.44,346.76 20.32,307 38.7,288.62 38.7,256 38.7,253.79 41.29,251.2 44.48,251.2 46.77,248.92 46.77,242.06 44.48,239.78 40.36,239.78 38.08,237.5 38.08,230.64 40.36,228.36 44.48,228.36 46.77,226.08 46.77,219.22 44.48,216.94 40.36,216.94 38.08,214.66 38.08,207.8 40.36,205.52 44.48,205.52 46.77,203.24 46.77,196.38 44.48,194.1 41.29,194.1 38.7,191.51 38.7,170 38.7,158.42 42.74,154.38 U1.F1
MIPI_CSI_D0P: FPC1.11 U1.F2 | length 542.8
  Top Layer w4.42: FPC1.11 -29.53,451.38 -24.37,446.22 -24.37,416 -24.37,407.13 -16.26,399.02 43.69,399.02 45.83,396.88 45.83,379.74 43.69,377.6 -33.15,377.6 -40.81,369.94 -40.81,345 -33.15,337.34 -23.34,337.34 7,307 28.66,285.34 28.66,133.9 U1.F2
MIPI_CSI_D1N: FPC1.8 U1.K1 | length 535
  Top Layer w4.42: FPC1.8 -91.23,472.35 -91.23,436 -91.23,426.9 -88.38,424.04 -81.15,424.04 -78.3,421.19 -78.3,415.48 -81.15,412.62 -88.38,412.62 -91.23,409.77 -91.23,404.06 -88.38,401.2 -81.15,401.2 -78.3,398.35 -78.3,392.64 -81.15,389.78 -88.38,389.78 -91.23,386.93 -91.23,373.3 -91.23,364 -91.23,336.19 -99.34,328.08 -129.09,328.08 -131.23,325.94 -131.23,308.8 -129.09,306.66 -82.9,306.66 -75.24,299 -75.24,274.06 -82.9,266.4 -129.09,266.4 -131.23,264.26 -131.23,247.12 -129.09,244.98 -99.34,244.98 -91.23,236.87 -91.23,228 -91.23,159.56 -83.24,151.57 U1.K1
MIPI_CSI_D1P: FPC1.7 U1.K2 | length 534.1
  Top Layer w4.42: FPC1.7 -108.27,451.38 -100.65,443.76 -100.65,364 -100.65,340.09 -103.24,337.5 -132.99,337.5 -140.65,329.84 -140.65,304.9 -132.99,297.24 -86.8,297.24 -84.66,295.1 -84.66,277.96 -86.8,275.82 -132.99,275.82 -140.65,268.16 -140.65,243.22 -132.99,235.56 -103.24,235.56 -100.65,232.97 -100.65,228 -100.65,140.29 -83.24,122.88 U1.K2
MIPI_CSI_D2N: FPC1.17 U1.E1 | length 526.3
  Top Layer w4.42: U1.E1 74.24,154.38 69.58,159.04 69.58,162 69.58,175.63 72.17,178.22 79.61,178.22 81.89,180.5 81.89,187.36 79.61,189.64 71.86,189.64 69.58,191.92 69.58,198.78 71.86,201.06 79.61,201.06 81.89,203.34 81.89,210.2 79.61,212.48 72.17,212.48 69.58,215.07 69.58,219.24 69.58,225.23 72.17,227.82 95.42,227.82 103.08,235.48 103.08,260.42 95.42,268.08 69.68,268.08 67.54,270.22 67.54,287.36 69.68,289.5 95.42,289.5 103.08,297.16 103.08,322.1 95.42,329.76 69.68,329.76 67.54,331.9 67.54,349.04 69.68,351.18 95.42,351.18 103.08,358.84 103.08,383.78 95.42,391.44 86.04,391.44 83.45,394.03 83.45,399 83.45,446.25 88.58,451.38 FPC1.17
MIPI_CSI_D2P: FPC1.16 U1.E2 | length 521.5
  Top Layer w4.42: FPC1.16@70,473.48 70,450.28 74.03,446.25 74.03,399 74.03,390.13 82.14,382.02 91.52,382.02 93.66,379.88 93.66,362.74 91.52,360.6 65.78,360.6 58.12,352.94 58.12,328 65.78,320.34 91.52,320.34 93.66,318.2 93.66,301.06 91.52,298.92 65.78,298.92 58.12,291.26 58.12,266.32 65.78,258.66 91.52,258.66 93.66,256.52 93.66,239.38 91.52,237.24 68.26,237.24 60.16,229.13 60.16,219.26 60.16,133.9 U1.E2
MIPI_CSI_D3N: FPC1.20 U1.L1 | length 538.3
  Top Layer w4.42: v1(-126.94,167.06) -126.94,165.12 -114.74,152.92 U1.L1 ; FPC1.20@147,474.37 148.13,473.24 148.13,420.12 v1(148.62,419.63)
  Bottom Layer w4.42: v1(-126.94,167.06) -126.94,164.68 -134.87,156.75 -138.53,156.75 -147,165.23 -147,176 -132,191 -125.92,191 -112.29,191 -109.7,188.41 -109.7,186.7 -107.42,184.42 -100.57,184.42 -98.28,186.7 -98.28,188.72 -96,191 -89.15,191 -86.86,188.72 -86.86,186.7 -84.58,184.42 -77.73,184.42 -75.44,186.7 -75.44,188.41 -72.85,191 -62.46,191 -56,197.46 142.49,395.95 142.49,410.4 148.62,416.53 v1(148.62,419.63)
MIPI_CSI_D3P: FPC1.19 U1.L2 | length 533.2
  Top Layer w4.42: v1(-130.48,135.56) U1.L2 ; FPC1.19@125.63,468.34 127.44,466.53 127.44,419.51 v1(126.93,419)
  Bottom Layer w4.42: v1(-130.48,135.56) -130.48,139.16 -134.35,143.02 -134.35,144.74 -136.94,147.33 -142.43,147.33 -156.42,161.32 -156.42,179.9 -135.9,200.42 -66.36,200.42 133.07,399.85 133.07,409.77 126.93,415.9 v1(126.93,419)
NetC25_2: C25.2 R4.1 U2.1 | length 57.6
  Top Layer w6.16: U2.1 201,-501 220.29,-520.29 220.29,-520.69 226.6,-527 v1(227,-527)
NetC26_2: C26.2 R5.1 R6.2 U2.5 | length 85.4
  Top Layer w6.16: U2.5 226.87,-603.36 R6.2 228.05,-638.47 v1(227.33,-639.18)
NetC27_1: C27.1 U1.A9 | length 22.3
  Top Layer w6.16: v1(184.48,-84.91) U1.A9
NetC28_1: C28.1 U1.C11 | length 29
  Top Layer w6.16: U1.C11 137.23,-165.77 148.27,-176.81 148.27,-184.94 v1(150.48,-187.15)
NetC29_1: C29.1 U1.D11 | length 22.3
  Top Layer w6.16: U1.D11 v1(121.48,-179.4)
NetC30_2: C30.2 R7.2 U1.H11 | length 77.5
  Top Layer w6.16: v1(-36,-179.4) U1.H11
  Bottom Layer w6.16: v1(-36,-179.4) R7.2 -35.02,-197.28 C30.2
NetC37_2: C37.2 R8.2 U3.3 | length 37.2
  Bottom Layer w6.16: v1(50.91,-604.18) 51.09,-604 R8.2
NetC38_2: C38.2 U3.4 | length 1.9
  Top Layer w6.16: U3.4 50.91,-500.09 v1(51,-500)
NetC43_2: C43.2 R9.2 R14.2 U4.3 | length 76.7
  Bottom Layer w6.16: C43.2 -77.28,-604.72 v1(-77,-605) -77,-604.46 R9.2@-77.46,-604 ; R9.2 R9.2@-77.46,-604 ; R14.2 R9.2@-77.46,-604
NetC44_2: C44.2 U4.4 | length 44.2
  Top Layer w6.16: U4.4 -78.09,-460.49 C44.2
NetC49_2: C49.2 R15.2 R16.2 U5.3 | length 74.3
  Bottom Layer w6.16: C49.2 -244.64,-604 v1(-207.36,-604) R16.2
NetC50_2: C50.2 U5.4
  other v1: -207.45,-501
NetL1_1: L1.1 U2.3 | length 75.2
  Top Layer w6.16: L1.1@105.65,-457.83 119.3,-444.18 L1.1
  Top Layer w10: U2.3 L1.1@105.65,-457.83
NetR1_1: R1.1 X1.3 | length 69.5
  Top Layer w6.16: R1.1 -412.73,-247.41 X1.3
NetR1_2: R1.2 U1.M11 | length 286.2
  Top Layer w6.16: R1.2 -269.44,-289 -146.23,-165.79 U1.M11
NetR2_2: R2.2 U1.H10 | length 22.3
  Top Layer w6.16: v1(-36,-147.9) U1.H10
NetR3_2: R3.2 U1.J10 | length 22.3
  Top Layer w6.16: v1(-67.49,-147.9) U1.J10
PWDN: FPC1.15 R14.1 R16.1 | length 1694.2
  Top Layer w6.16: FPC1.15 50.61,473.61 v1(50.61,425.39)
  Bottom Layer w6.16: R16.1 -147.82,-547 -66.54,-547 R14.1 -43,-472.39 -53,-462.39 -53,-318 -83,-288 -172,-288 -180,-280 -305,-280 -325,-260 -325,222 -202,345 -27,345 50.61,422.61 v1(50.61,425.39)
RSTn: D1.2 FPC1.22 R17.1 | length 885.7
  Top Layer w6.16: D1.2 -390.76,282.24 v1(-389,284) ; v1(-388,421) -387,422 -360,422 -255,527 -232,527 -205,554 157,554 187.01,523.99 FPC1.22
  Layer 2 w6.16: v1(-389,284) v1@-388,285
  Bottom Layer w6.16: v1@-388,285 v1(-388,421)
VDD_3V3: C22.2 C23.2 C24.2 C31.2 C32.2 C39.2 C40.2 C45.2 C46.2 FB1.2 R9.1 R10.2 R11.2 R15.1 R17.2 U3.1 U4.1 U5.1 | length 2459.4
  Top Layer w12: U5.1 -280,-605.61 -280,-653 v1(-272,-661) -271.82,-661.18 C45.2@-270.85,-661.18 ; v1(-208,-568.86) -206.46,-568.86 -203.14,-565.54 -190.71,-565.54 -168.55,-587.71 -158.7,-587.71 -152.89,-593.52 -152.89,-649.68 -139.01,-663.57 v1(-137.54,-663.57) ; v1(-76,-568.86) -75.78,-569.08 -49.15,-569.08 -23.89,-594.34 U3.1 U3.1 -23.95,-659.95 C31.2
  Layer 2 w12: v1(-272,-661) -240,-693 -108.1,-693 ; v1(-137.54,-663.57) -108.1,-693 ; v1(-16.36,-659.49) -15.27,-660.58 -15.27,-676.73 1,-693 ; v1(131,-349) 131.5,-348.5 159.5,-348.5 v1(160,-348) ; v1@159,-347 v1(160,-348) ; v1(183,-349) 182.5,-348.5 160.5,-348.5 v1(160,-348) ; -108.1,-693 1,-693 ; 1,-693 15,-693 160,-548 v1(160,-348)
  Bottom Layer w12: v1(-389,250.54) -475,164.54 -475,-129.93 -427.54,-177.39 R10.2 -426.4,-405.13 -426.4,-527.27 R11.2 -405.67,-548 -229.89,-548 -209.03,-568.86 v1(-208,-568.86) -208,-569.89 R15.1 ; C40.2 -138.72,-664.75 v1(-137.54,-663.57) ; R9.1 -77.04,-569.9 v1(-76,-568.86) ; FB1.2 92.97,-431.54 141.29,-383.22 147.78,-383.22 C23.2@156.54,-374.46 ; C22.2 153.54,-322.54 158,-327 156.91,-328.09 156.91,-348.91 v1@157.82,-349.82 ; v1(160,-348) 158.91,-349.09 158.91,-368.55 C23.2 C23.2@156.54,-374.46 ; C24.2 202.83,-374.46 C23.2@156.54,-374.46
  other v1: -152.35,-638 -279.46,-634 -23.4,-634
VDD_5V: C17.2 C18.2 FPC1.1 FPC1.2 FPC1.3 R4.2 U2.4 | length 2907.4
  Top Layer w12: FPC1.1@-226.49,451.45 v1(-226.49,429.03) -219.47,422 v1(-206.81,422) ; FPC1.2 -206.69,422.12 v1(-206.81,422) ; FPC1.3@-187.1,451.47 -187.1,447.82 v1(-187.12,429.03) -194.15,422 v1(-206.81,422) ; v1(86,-662) 86.41,-661.59 111.59,-661.59 C17.2@112,-662 ; v1(112.51,-661.18) 112.51,-620.07 105.64,-613.2 U2.4 105.64,-593.52 111.45,-587.71 121.3,-587.71 143,-566 204.81,-566 206.05,-564.76 223.21,-564.76 R4.2
  Layer 2 w12: v1(-206.81,422) -206.81,604.19 -163,648 375,648 533,490 533,-451 295,-689 140.32,-689 v1@112.92,-661.59 ; v1(86,-662) 86.41,-661.59 v1@112.92,-661.59 ; v1(112.51,-661.18) v1@112.92,-661.59 ; v1@113,-658 v1(113,-631) ; v1@114,-662 113.59,-661.59 v1@112.92,-661.59
pads on no net: FPC1.13 FPC1.14 U1.A8 U1.B8 U1.C3 U1.C4 U1.C5 U1.C6 U1.C7 U1.C8 U1.C9 U1.D3 U1.D9 U1.E3 U1.E9 U1.E10 U1.E11 U1.G10 U1.K3 U1.K4 U1.K6 U1.K9 U1.K11 U1.L3 U1.L4 U1.L6 U1.L9 U1.L10 U1.L11 U1.M3 U1.M4 U1.M5 U1.M6 U1.M7 U1.M8 U1.M9 X1.1

## Polygon pours and split planes (outlines as drawn)
GND on Top Layer "GND_L01_P024" (solid, remove dead copper, pour order 24): -590.55,728.35 590.55,728.35 590.55,-728.35 -590.55,-728.35
NetL1_1 on Top Layer "NETL1_1_L01_P001" (solid, remove dead copper, pour order 1): 93,-523 92,-522 92,-428 170,-428 171,-427 172,-428 172,-460 138,-460 117,-481 117,-523
AVDD_3V3 on Top Layer "AVDD_3V3_L01_P002" (solid, remove dead copper, pour order 2): 77,-397 96,-416 192,-416 192,-420 207,-435 239,-435 239,-405 218,-384 218,-360 198,-360 195,-363 77,-363
VDD_5V on Top Layer "VDD_5V_L01_P015" (solid, remove dead copper, pour order 15): -234,463 -237,460 -237,412 -231,406 -182,406 -177,411 -177,463
VDD_5V on Top Layer "VDD_5V_L01_P000" (solid, remove dead copper, pour order 0): 82,-678 75,-671 75,-589 83,-581 122,-581 127,-586 127,-678
VDD_3V3 on Top Layer "VDD_3V3_L01_P006" (solid, remove dead copper, pour order 6): -10,-677 -10,-585 -12,-583 -37,-583 -41,-587 -41,-677
2V8 on Top Layer "2V8_L01_P007" (solid, remove dead copper, pour order 7): -36,-523 -35,-522 -35,-373 -6,-373 -6,-518 -12,-524
VDD_3V3 on Top Layer "VDD_3V3_L01_P009" (solid, remove dead copper, pour order 9): -141,-582 -126,-597 -126,-679 -128,-681 -158,-681 -158,-680 -164,-674 -164,-582
DOVDD_1V8 on Top Layer "DOVDD_1V8_L01_P010" (solid, remove dead copper, pour order 10): -165,-523 -173,-515 -173,-434 -143,-434 -142,-435 -111,-435 -111,-439 -102,-448 -102,-483 -141,-522
VDD_3V3 on Top Layer "VDD_3V3_L01_P011" (solid, remove dead copper, pour order 11): -271,-582 -271,-630 -254,-647 -255,-648 -255,-675 -288,-675 -294,-669 -294,-582
DVDD_1V2 on Top Layer "DVDD_1V2_L01_P012" (solid, remove dead copper, pour order 12): -320,-523 -320,-391 -274,-391 -262,-403 -262,-514 -271,-523
GND on Layer 2 "GND_L02_P026" (solid, remove dead copper, pour order 26): -590.55,728.35 -590.55,-728.35 590.55,-728.35 590.55,728.35
AVDD_2V8 on Layer 2 "AVDD_2V8_L02_P021" (solid, remove dead copper, pour order 21): 238.83,170.24 156.16,170.24 74.92,89 -97,89 -122,64 -118.22,60.22 -118.22,34.49 -112.9,34.49 -79.83,1.41 -79.83,-94.83 -74.24,-100.41 100.24,-100.41 105.41,-95.24 105.41,31.02 131.93,31.02 156.69,55.79 156.69,91.04 179.24,113.59 179.83,113 237,113
AVDD_2V8 on Layer 2 "AVDD_2V8_L02_P019" (solid, remove dead copper, pour order 19): 27,-408 28,-409 58,-409 58,-370 105,-323 342,-323 410,-255 410,131 370,171 5,171 233,171 181,119 253,119 282,90 282,-194 204,-272 -31,-272 -74,-315 -74,-407
DVDD_1V2 on Layer 2 "DVDD_1V2_L02_P020" (solid, remove dead copper, pour order 20): -286,-417 -243,-417 -202,-376 -203,-375 -203,-96 -237,-62 -236,-61 -236,-45 -234,-45 -207,-18 -163,-18 -131,-50 -132,-51 -132,-125 -96,-161 -93,-158 21,-158 91,-228 174,-228 232,-170 232,-12 199,21 199,71 212,84 258,84 263,89 263,109 253,119 176,119 176,118 100,42 100,-94 -74,-94 -76,-92 -76,8 -122,54 -122,119 -379,119 -379,-380 -340,-419
DOVDD_1V8 on Layer 2 "DOVDD_1V8_L02_P018" (solid, remove dead copper, pour order 18): -118,-470 -75,-427 -75,-314 -73,-314 -30,-271 204,-271 281,-194 281,60 258,83 212,83 199,70 200,69 200,20 230,-10 230,-176 176,-230 87,-230 87,-226 20,-159 18,-161 -97,-161 -132,-126 -132,-50 -165,-17 -167,-19 -208,-19 -236,-47 -236,-61 -203,-94 -203,-440 -173,-470
VDD_3V3 on Layer 2 "VDD_3V3_L02_P017" (solid, remove dead copper, pour order 17): -291,-676 -239,-728 72,-728 82,-718 82,-640 171,-551 171,-393 196,-368 196,-327 101,-327 58,-370 58,-553 56,-553 16,-593 -291,-593
VDD_5V on Layer 2 "VDD_5V_L02_P016" (solid, remove dead copper, pour order 16): -231,406 -183,406 -182,405 -177,410 -177,521 -147,551 305,551 410,446 410,-474 253,-631 104,-631 82,-653 82,-718 93,-729 93.65,-728.35 590.55,-728.35 590.55,728.35 588.9,730 -235,730
GND on Bottom Layer "GND_L04_P027" (solid, remove dead copper, pour order 27): -590.55,728.35 590.55,728.35 590.55,-728.35 -590.55,-728.35
DVDD_1V2 on Bottom Layer "DVDD_1V2_L04_P025" (solid, remove dead copper, pour order 25): -232,56 -231,55 5,55 105,155 163,155 183,175 183,216 175,224 64,224 -32,128 -219,128 -235,112
GND on Bottom Layer "GND_L04_P023" (solid, remove dead copper, pour order 23): 137,-447 138,-446 195,-446 199,-442 197,-440 197,-396 190,-389 189,-390 173,-390 173,-391 136,-428
GND on Bottom Layer "GND_L04_P022" (solid, remove dead copper, pour order 22): -37,-405 -36,-406 -7,-406 -7,-384 17,-360 17,-333 -31,-333 -36,-338
VDD_3V3 on Bottom Layer "VDD_3V3_L04_P013" (solid, remove dead copper, pour order 13): 75,-446 112,-446 170,-388 214,-388 220,-382 219,-381 219,-350 209,-340 194,-340 194,-319 179,-304 178,-305 134,-305 114,-325 114,-390 87,-417 74,-417
GND on Layer 3 "GND_L03_P014" (solid, remove dead copper, pour order 14): -590.55,728.35 590.55,728.35 590.55,-728.35 -590.55,-728.35

## Other copper
Top Layer:
  pour cut-out: -148,336 -149,335 -149,179 -141,171 115,171 120,176 111,185 111,389 95,405 95,457 -135,457 -146,446
  pour cut-out: -96.65,-443.05 -96.65,-469.98 -94.9,-471.74 -94.9,-474.35 -91.95,-474.35 -90.34,-472.74 -90.34,-443.05
  pour cut-out: -405.71,-385.38 -405.71,-422.62 -352.66,-422.62 -352.66,-444.32 -330.41,-466.57 -328.34,-464.49 -325.41,-464.49 -325.41,-388.76 -322.24,-385.59 -298.59,-385.59 -298,-385 -298,-375 -352.49,-375 -352.66,-374.84 -352.66,-385.38
  pour cut-out: 197.25,-577.22 197.25,-595.13 235.1,-595.13 242.89,-587.34 241.89,-586.34 241.89,-575.76
  pour cut-out: -364.38,-258.27 -364.43,-258.31 -364.43,-274.16 -404.49,-274.16 -404.49,-258.27
  pour cut-out: -242.41,412 -242,411.59 -242,369 -181,369 -178,372 -182,376 -182,406 -237.78,406
  pour cut-out: -127.95,475 -171.08,431.87 -171.08,360.27 -145.46,334.65 -92.77,334.65 -92.77,470.81 -91.23,472.35
  pour cut-out: -243.72,179.9 -243.72,-192.24 234.72,-192.24 234.72,179.9
Bottom Layer:
  pour cut-out: -192.52,-555.69 -192.52,-592.23 -191.2,-593.54 -189.13,-591.47 -186.2,-591.47 -186.2,-555.69

## Silkscreen, mask and mechanical layers (free items; w line width, h text height)
Top Overlay:
  circle w10: c-393.7,0 r86.61
  circle w10: c393.7,0 r86.61
  lines w10: 262,385 281,385 297,401 297,447 283,433 ; 298,448 299,448 315,432 ; -334.65,-334.65 334.65,-334.65 ; -334.65,-334.65 -334.65,334.65 ; -334.65,-334.65 -295.28,-295.28 ; -334.65,334.65 334.65,334.65 ; -334.65,334.65 -295.28,295.28 ; -334.65,334.65 -334.65,334.65 ; -295.28,-295.28 295.28,-295.28 ; -295.28,-295.28 -295.28,295.28 ; -295.28,295.28 295.28,295.28 ; 295.28,-295.28 295.28,295.28 ; 295.28,-295.28 334.65,-334.65 ; 295.28,-295.28 295.28,-295.28 ; 295.28,295.28 334.65,334.65 ; 334.65,-334.65 334.65,334.65
  text "for EMBEDFIRE" at -248,364 h40
Bottom Overlay:
  drawing of 85 lines, arcs and shapes, not listed
  text "IMX 415" at 92,420 h60
Mechanical 1:
  circle w10: c511.81,-649.61 r41.34
  circle w10: c-511.81,-649.61 r41.34
  circle w10: c511.81,649.61 r41.34
  circle w10: c-511.81,649.61 r41.34
  circle w10: c314.96,-314.96 r17.72
  circle w10: c-314.96,-314.96 r17.72
  circle w10: c314.96,314.96 r17.72
  circle w10: c-314.96,314.96 r17.72
  circle w10: c393.7,0 r41.34
  circle w10: c-393.7,0 r41.34
  lines w10: -590.55,-728.35 590.55,-728.35 590.55,728.35 -590.55,728.35 -590.55,-728.35